# EAGLE board v1 (EAGLE 5.10)
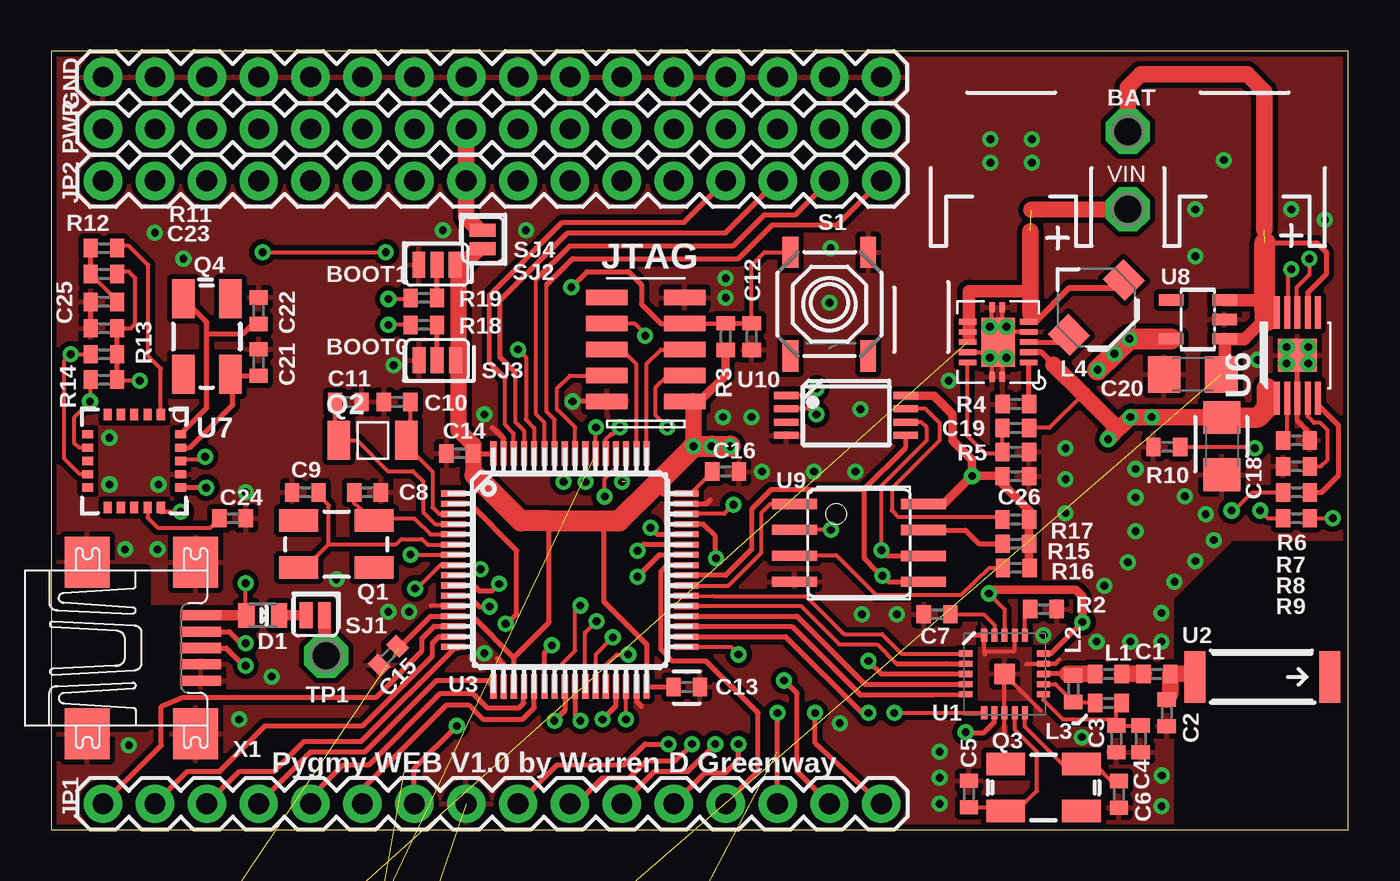
[diagram p0: board, top side]
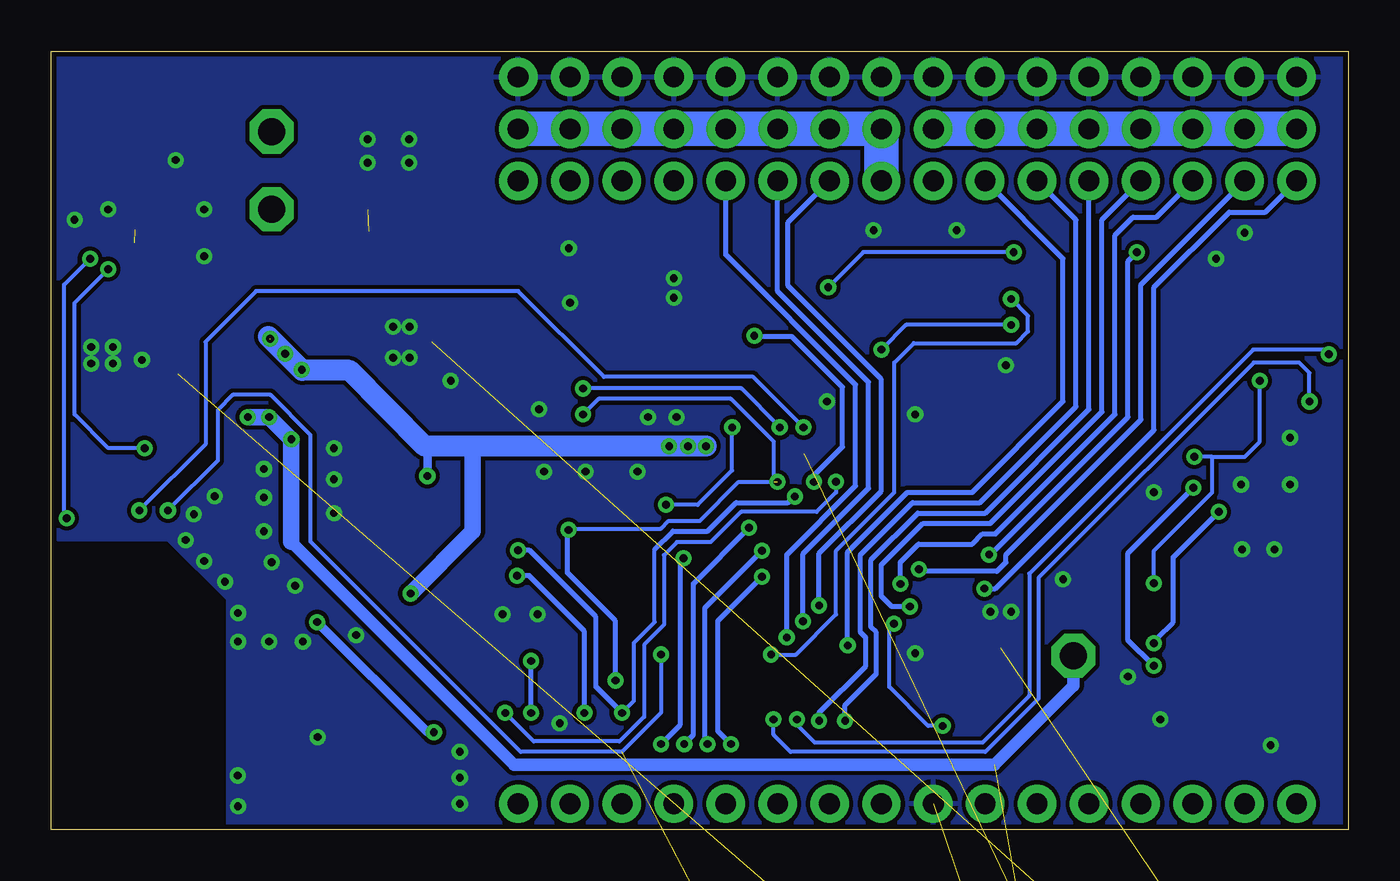
[diagram p1: board, bottom side, seen from below]

Size 63.51 x 38.1 mm. Coordinates in mm from the lower left corner, seen from the top.
Outline: 0,0 63.51,0 63.51,38.1 0,38.1 0,0
Copper layers (1*16): Top 0.035mm / dielectric 1.5mm / Bottom 0.035mm
Design rules "default *": minimum track width 8mil, minimum drill 15mil, track to track 8mil, track to pad 6mil, pad to pad 6mil, via to via 8mil, smd to smd 6mil, copper to edge 10mil, drill to drill 8mil, minimum pad ring 10mil, minimum via ring 8mil, stop-mask expansion 4mil, vias tented up to drill 0mil, thermal gap 10mil

## Footprints (pad centres in the part's own frame; a part is rotated, then mirrored left to right if it is on the bottom)
P1-13 = drill 1.321 pad 2.159 octagon: TP 0,0
C0402 = smd 0.7 x 0.9: 1 -0.65,0; 2 0.65,0
C1206 = smd 1.6 x 1.8: 1 -1.4,0; 2 1.4,0
MICROMELF-R = smd 0.8 x 1.2: A 0.8,0; C -0.8,0
1X16 = drill 1.016 pad 1.88 round: 1 0,0; 2 2.54,0; 3 5.08,0; 4 7.62,0; 5 10.16,0; 6 12.7,0; 7 15.24,0; 8 17.78,0; 9 20.32,0; 10 22.86,0; 11 25.4,0; 12 27.94,0; 13 30.48,0; 14 33.02,0; 15 35.56,0; 16 38.1,0
JST-2-SMD = smd 1 x 4.6: 1 -1,-3.7; 2 1,-3.7 | smd 1.6 x 3.4: NC1 -3.4,1.5; NC2 3.4,1.5
CDRH3D28 = smd 1.5 x 1.4 rotated 315: 1 -1.374,-1.384; 2 1.312,1.302
CRYSTAL-SMD-5X3 = smd 1.9 x 1.1: 1 -1.85,-1.15; 2 1.85,-1.15; 3 1.85,1.15; 4 -1.85,1.15
CM415 = smd 1.1 x 1.9: P$1 0,0; P$2 3.3,0
R0402 = smd 0.7 x 0.9: 1 -0.65,0; 2 0.65,0
TACTILE_SWITCH_SMD = smd 1.524 x 0.762: 1 -2.54,1.905; 2 2.54,1.905; 3 -2.54,-1.905; 4 2.54,-1.905
SJ_2S = smd 0.635 x 1.27: 1 -0.45,0; 2 0.45,0
SJ_3_PASTE1&2 = smd 0.635 x 1.27: 1 -0.889,0; 2 0,0; 3 0.889,0
QFN20 = smd 1 x 1: 0 0,0 | smd 0.65 x 0.3: 1 -1.9,1; 2 -1.9,0.5; 3 -1.9,0; 4 -1.9,-0.5; 5 -1.9,-1; 11 1.9,-1; 12 1.9,-0.5; 13 1.9,0; 14 1.9,0.5; 15 1.9,1 | smd 0.3 x 0.65: 6 -1,-1.9; 7 -0.5,-1.9; 8 0,-1.9; 9 0.5,-1.9; 10 1,-1.9; 16 1,1.9; 17 0.5,1.9; 18 0,1.9; 19 -0.5,1.9; 20 -1,1.9
ANTENNA-CHIP5 = smd 1.016 x 2.54: FEED -3.302,0; NC 3.302,0
S-PQFP64-G64 = smd 1.2 x 0.3: 1 -5.7,3.75; 2 -5.7,3.25; 3 -5.7,2.75; 4 -5.7,2.25; 5 -5.7,1.75; 6 -5.7,1.25; 7 -5.7,0.75; 8 -5.7,0.25; 9 -5.7,-0.25; 10 -5.7,-0.75; 11 -5.7,-1.25; 12 -5.7,-1.75; 13 -5.7,-2.25; 14 -5.7,-2.75; 15 -5.7,-3.25; 16 -5.7,-3.75; 33 5.7,-3.75; 34 5.7,-3.25; 35 5.7,-2.75; 36 5.7,-2.25; 37 5.7,-1.75; 38 5.7,-1.25; 39 5.7,-0.75; 40 5.7,-0.25; 41 5.7,0.25; 42 5.7,0.75; 43 5.7,1.25; 44 5.7,1.75; 45 5.7,2.25; 46 5.7,2.75; 47 5.7,3.25; 48 5.7,3.75 | smd 0.3 x 1.2: 17 -3.75,-5.7; 18 -3.25,-5.7; 19 -2.75,-5.7; 20 -2.25,-5.7; 21 -1.75,-5.7; 22 -1.25,-5.7; 23 -0.75,-5.7; 24 -0.25,-5.7; 25 0.25,-5.7; 26 0.75,-5.7; 27 1.25,-5.7; 28 1.75,-5.7; 29 2.25,-5.7; 30 2.75,-5.7; 31 3.25,-5.7; 32 3.75,-5.7; 49 3.75,5.7; 50 3.25,5.7; 51 2.75,5.7; 52 2.25,5.7; 53 1.75,5.7; 54 1.25,5.7; 55 0.75,5.7; 56 0.25,5.7; 57 -0.25,5.7; 58 -0.75,5.7; 59 -1.25,5.7; 60 -1.75,5.7; 61 -2.25,5.7; 62 -2.75,5.7; 63 -3.25,5.7; 64 -3.75,5.7
STM32-JTAG-10P = smd 0.762 x 2.032: P$1 0,0; P$2 0,3.81; P$3 1.27,0; P$4 1.27,3.81; P$5 2.54,0; P$6 2.54,3.81; P$7 3.81,0; P$8 3.81,3.81; P$9 5.08,0; P$10 5.08,3.81
S-PVSON-N10 = smd 0.28 x 0.85: P$1 0,0.4; P$2 0.5,0.4; P$3 1,0.4; P$4 1.5,0.4; P$5 2,0.4; P$6 2,3.4; P$7 1.5,3.4; P$8 1,3.4; P$9 0.5,3.4; P$10 0,3.4 | smd 2.4 x 1.65: P$11 1,1.9 | smd 0.5 x 0.26: P$12 -0.7,2.2; P$13 -0.7,1.7; P$14 2.7,1.7; P$15 2.7,2.2
R-PDSO-G10 = smd 0.3 x 1.6: P$1 0,0; P$2 0.5,0; P$3 1,0; P$4 1.5,0; P$5 2,0; P$6 2,4.2; P$7 1.5,4.2; P$8 1,4.2; P$9 0.5,4.2; P$10 0,4.2 | smd 1.9 x 1.6: P$11 1,2.1
QFN-20-5X5 = smd 0.55 x 0.4: P1 0,-0.975; P2 0,-1.625; P3 0,-2.275; P4 0,-2.925; P5 0,-3.575; P11 4.55,-3.575; P12 4.55,-2.925; P13 4.55,-2.275; P14 4.55,-1.625; P15 4.55,-0.975 | smd 0.4 x 0.55: P6 0.975,-4.55; P7 1.625,-4.55; P8 2.275,-4.55; P9 2.925,-4.55; P10 3.575,-4.55; P16 3.575,0; P17 2.925,0; P18 2.275,0; P19 1.625,0; P20 0.975,0
SOT23-5L = smd 0.55 x 1.2: 1 -0.95,-1.3; 2 0,-1.3; 3 0.95,-1.3; 4 0.95,1.3; 5 -0.95,1.3
SOIC8 = smd 0.5 x 2.2: 1 -1.905,-3.154; 2 -0.645,-3.154; 3 0.625,-3.154; 4 1.895,-3.154; 5 1.905,3.154; 6 0.635,3.154; 7 -0.635,3.154; 8 -1.905,3.154
TSSOP8 = smd 1.2 x 0.35: 1 -2.925,0.975; 2 -2.925,0.325; 3 -2.925,-0.325; 4 -2.925,-0.975; 5 2.925,-0.975; 6 2.925,-0.325; 7 2.925,0.325; 8 2.925,0.975
AYZ0202 = smd 1 x 1.15: 1 -2.5,2.825; 2 0,2.825; 3 2.5,2.825; 4 -2.5,-2.825; 5 0,-2.825; 6 2.5,-2.825 | hole 0.85: 1.5,0; -1.5,0
UX60A-MB-5ST = smd 2 x 0.5: 1 2.25,1.6; 2 2.25,0.8; 3 2.25,0; 4 2.25,-0.8; 5 2.25,-1.6 | smd 2.2 x 2.5: M1 -3.3,-4.2; M2 -3.3,4.2; M3 2,4.2; M4 2,-4.2

## Placement (x,y rotation side)
BAT  TPPAD1-13  [P1-13]  52.7,34.16 0 top
BAT1  TPPAD1-13  [P1-13]  6.3,-40.44 0 top  (outside the outline)
C1  1.5pF  [C0402]  54.13,7.62 180 top
C2  1.0pF  [C0402]  54.61,5.71 270 top
C3  0.0022uF  [C0402]  52.15,4.45 270 top
C4  4.7pF  [C0402]  53.34,4.45 270 top
C5  12.5pF  [C0402]  44.93,1.75 90 top
C6  12.5pF  [C0402]  52.27,1.73 270 top
C7  0.033uF  [C0402]  43.37,10.54 180 top
C8  12.5pF  [C0402]  15.49,16.51 0 top
C9  12.5pF  [C0402]  12.45,16.51 180 top
C10  18pF  [C0402]  16.94,20.93 180 top
C11  18pF  [C0402]  14.55,20.93 0 top
C12  220pF  [C0402]  34.29,24.13 270 top
C13  0.1uF  [C0402]  31.11,6.99 0 top
C14  0.1uF  [C0402]  20,18.41 180 top
C15  0.1uF  [C0402]  16.51,8.51 225 top
C16  0.1uF  [C0402]  33.02,17.53 0 top
C17  10uF  [C1206]  2.24,-148.95 0 top  (outside the outline)
C18  10uF  [C1206]  57.3,18.77 270 top
C19  0.1uF  [C0402]  47.23,20.83 180 top
C20  10uF  [C1206]  55.88,22.28 180 top
C21  18pF  [C0402]  10.16,22.86 90 top
C22  18pF  [C0402]  10.16,25.4 90 top
C23  0.1uF  [C0402]  2.59,25.83 180 top
C24  0.47uF  [C0402]  8.89,15.24 0 top
C25  0.1uF  [C0402]  2.59,24.54 180 top
C26  0.1uF  [C0402]  47.22,17.3 0 top
C27  10uF  [C1206]  -4.06,-18.69 0 top  (outside the outline)
C28  0.1uF  [C0402]  0,-39.83 90 top  (outside the outline)
C29  10uF  [C1206]  -1.22,-33.73 0 top  (outside the outline)
C30  10uF  [C1206]  3.66,-33.73 0 top  (outside the outline)
D1  [MICROMELF-R]  10.36,10.49 180 top
GND  M16PTH  [1X16]  40.64,36.83 180 top
JP1  M16PTH  [1X16]  2.54,1.27 0 top
JP2  M16PTH  [1X16]  2.54,31.75 0 top
JP3  [JST-2-SMD]  -4.88,-51.21 0 top  (outside the outline)
L1  3.9nH  [C0402]  51.75,7.62 180 top
L2  8.2nH  [C0402]  50.04,6.9 270 top
L3  2.7nH  [C0402]  51.76,6.2 180 top
L4  [CDRH3D28]  51.14,25.51 180 top
L5  [CDRH3D28]  11.18,-33.73 0 top  (outside the outline)
PWR  M16PTH  [1X16]  2.54,34.29 0 top
Q1  12MHz  [CRYSTAL-SMD-5X3]  13.97,13.97 180 top
Q2  CM415  [CM415]  14.1,19.05 0 top
Q3  16MHz  [CRYSTAL-SMD-5X3]  48.58,2.06 0 top
Q4  12MHz  [CRYSTAL-SMD-5X3]  7.62,24.13 90 top
R1  2M  [R0402]  9.75,-50.6 0 top  (outside the outline)
R2  22K  [R0402]  48.58,10.79 180 top
R3  100K  [R0402]  33.02,24.13 270 top
R4  2M  [R0402]  47.22,19.66 0 top
R5  220K  [R0402]  47.22,18.49 180 top
R6  1K  [R0402]  60.96,19.05 180 top
R7  1K  [R0402]  60.96,17.78 0 top
R8  330  [R0402]  60.96,16.51 0 top
R9  330  [R0402]  60.96,15.24 0 top
R10  10K  [R0402]  54.61,18.73 0 top
R11  10K  [R0402]  2.59,27.19 0 top
R12  470  [R0402]  2.59,28.46 180 top
R13  47K  [R0402]  2.59,23.27 0 top
R14  47K  [R0402]  2.59,22.02 0 top
R15  100K  [R0402]  47.23,14 0 top
R16  100K  [R0402]  47.24,12.81 180 top
R17  100K  [R0402]  47.22,15.18 180 top
R18  47K  [R0402]  18.25,24.7 180 top
R19  47K  [R0402]  18.25,26.02 180 top
R20  220K  [R0402]  12.19,-39.62 0 top  (outside the outline)
R21  1K  [R0402]  0.2,-45.52 0 top  (outside the outline)
R22  1K  [R0402]  5.28,-45.52 0 top  (outside the outline)
R23  330  [R0402]  10.36,-45.52 0 top  (outside the outline)
R24  330  [R0402]  -5.49,-50.6 0 top  (outside the outline)
R25  10K  [R0402]  -0.41,-50.6 0 top  (outside the outline)
S1  SWITCH-MOMENTARY-2SMD  [TACTILE_SWITCH_SMD]  38.1,25.72 270 top
SJ1  SOLDERJUMPERNC  [SJ_2S]  12.93,10.49 0 top
SJ2  [SJ_3_PASTE1&2]  18.89,27.65 0 top
SJ3  [SJ_3_PASTE1&2]  18.9,22.97 0 top
SJ4  SOLDERJUMPERNC  [SJ_2S]  21.13,28.88 270 top
TP1  TPPAD1-13  [P1-13]  13.46,8.51 0 top
TP2  TPPAD1-13  [P1-13]  4.67,-51.41 0 top  (outside the outline)
U1  NRF24L01SMD  [QFN20]  46.67,7.62 0 top
U2  ANTENNA2SMD5  [ANTENNA-CHIP5]  59.29,7.47 0 top
U3  STM32F100R4T6B  [S-PQFP64-G64]  25.4,12.7 0 top
U4  STM32-JTAG-10P  [STM32-JTAG-10P]  31.01,20.95 90 top
U5  TPS61201  [S-PVSON-N10]  48.26,22.86 90 top
U6  BQ24090  [R-PDSO-G10]  60.01,21.11 0 top
U7  MICROCHIP-USB-MCP2200  [QFN-20-5X5]  6.35,20.32 270 top
U8  NCP500  [SOT23-5L]  56.13,24.97 90 top
U9  SST25VF080B  [SOIC8]  39.55,14.03 270 top
U10  N25S0830HA  [TSSOP8]  38.91,20.27 0 top
U11  BQ24090  [R-PDSO-G10]  13,-21.13 90 top  (outside the outline)
U12  TPS61201  [S-PVSON-N10]  -5.89,-40.64 270 top  (outside the outline)
U13  NCP500  [SOT23-5L]  -4.88,-26.21 0 top  (outside the outline)
U$1  AYZ0202  [AYZ0202]  1.22,-53.44 0 top  (outside the outline)
VIN  TPPAD1-13  [P1-13]  52.7,30.35 0 top
VIN1  TPPAD1-13  [P1-13]  -5.69,-46.33 0 top  (outside the outline)
X1  MINI-USB-UX60A-MB-5ST  [UX60A-MB-5ST]  5.08,8.89 0 top

## Library data of the parts
BAT BAT1 TP1 TP2 VIN VIN1 = testpad
C1-C30 R1-R25 = rcl
D1 = diode
GND JP1-JP3 L1-L5 PWR Q1 Q3 Q4 S1 SJ1-SJ4 U1 U2 U$1 = SparkFun
Q2 U3-U13 X1 = dublib

## Nets
+3V3: C13.1 C14.1 C15.1 C16.1 C26.1 R3.2 R15.2 R16.1 R17.1 SJ2.3 SJ3.3 SJ4.2 U1.7 U1.15 U1.18 U3.1 U3.13 U3.19 U3.32 U3.48 U3.64 U4.P$1 U8.5 U9.8 U10.8 U13.5
+5V: C17.1 C18.1 R1.2 R4.2 SJ1.2 TP1.TP TP2.TP U5.P$2 U6.P$1 U11.P$1 U12.P$2
ADC1_IN10: JP2.1 U3.8
ADC1_IN11: JP2.2 U3.9
ADC1_IN12: JP2.3 U3.10
ADC1_IN13: JP2.4 U3.11
ADC1_IN14: JP2.5 U3.24
ADC1_IN15: JP2.6 U3.25
BAT_CHG: R9.1 R24.1 U3.54
BAT_PG: R8.1 R23.1 U3.33
BOOT0: R18.2 U3.60
BOOT1: R19.2 U3.28
DAC1_OUT: JP1.5 U3.20
DAC2_OUT: JP1.6 U3.21
FLASH_CS: U3.39 U9.1
GND: C2.2 C3.2 C4.2 C5.2 C6.2 C7.2 C8.2 C9.2 C10.2 C11.2 C12.2 C13.2 C14.2 C15.2 C16.2 C17.2 C18.2 C19.2 C20.2 C21.2 C22.2 C23.2 C24.2 C25.2 C26.2 C27.1 C28.2 C29.2 C30.1 GND.1 GND.2 GND.3 GND.4 GND.5 GND.6 GND.7 GND.8 GND.9 GND.10 GND.11 GND.12 GND.13 GND.14 GND.15 GND.16 JP1.8 JP3.2 R2.1 R5.1 R6.1 R7.1 R10.1 R20.1 R21.1 R22.1 R25.1 S1.1 SJ2.1 SJ3.1 U1.0 U1.8 U1.14 U1.17 U1.20 U3.12 U3.18 U3.31 U3.47 U3.63 U4.P$2 U4.P$9 U5.P$4 U5.P$9 U5.P$11 U5.P$12 U5.P$13 U5.P$14 U5.P$15 U6.P$3 U6.P$11 U7.P17 U8.2 U9.4 U10.4 U11.P$3 U11.P$11 U12.P$4 U12.P$9 U12.P$11 U12.P$12 U12.P$13 U12.P$14 U12.P$15 U13.2 X1.4 X1.5 X1.M1 X1.M2 X1.M3 X1.M4
JTCK: U3.49 U4.P$5
JTDI: U3.50 U4.P$6
JTDO: U3.55 U4.P$8
JTMS: U3.46 U4.P$3
JTRST: U3.56 U4.P$4
N$1: C1.1 C2.1 U2.FEED
N$2: C1.2 L1.1
N$3: L1.2 L2.1 U1.13
N$4: L2.2 L3.2 U1.12
N$5: C3.1 C4.1 L3.1 U1.11
N$6: C27.2 L4.1 U5.P$5 U5.P$6 U5.P$7 U5.P$8 VIN.TP
N$7: C6.1 Q3.3 U1.10
N$8: C5.1 Q3.1 U1.9
N$9: R4.1 R5.2 U5.P$10
N$10: R2.2 U1.16
N$11: C7.1 U1.19
N$12: R6.2 U6.P$2
N$13: R7.2 U6.P$4
N$14: R8.2 U6.P$5
N$15: C19.1 U5.P$1
N$16: L4.2 U5.P$3
N$17: R9.2 U6.P$8
N$18: R10.2 U6.P$9
N$19: C23.1 R11.1 R12.2
N$20: C25.1 D1.A R11.2 R13.2 R14.2 U7.P18 X1.1
N$21: C22.1 Q4.3 U7.P20
N$22: C21.1 Q4.1 U7.P19
N$23: C30.2 L5.1 U12.P$5 U12.P$6 U12.P$7 U12.P$8 U$1.3 VIN1.TP
N$24: R12.1 U7.P1
N$25: U7.P16 X1.3
N$26: U7.P15 X1.2
N$27: R17.2 U10.7
N$28: C24.1 U7.P14
N$29: D1.C SJ1.1
N$30: R16.2 U9.3
N$31: R18.1 SJ3.2
N$32: R15.1 U9.7
N$33: R19.1 SJ2.2
N$34: JP2.8 PWR.1 PWR.2 PWR.3 PWR.4 PWR.5 PWR.6 PWR.7 PWR.8 SJ4.1
N$35: R1.1 R20.2 U12.P$10
N$36: C28.1 U12.P$1
N$37: L5.2 U12.P$3
N$38: R21.2 U11.P$2
N$39: R22.2 U11.P$4
N$40: R23.2 U11.P$5
N$41: R25.2 U11.P$9
N$42: R24.2 U11.P$8
N$43: JP3.1 U$1.2
NRST: C12.1 R3.1 S1.3 U3.7 U4.P$7
OSC32_IN: C10.1 Q2.P$2 U3.3
OSC32_OUT: C11.1 Q2.P$1 U3.4
OSC_IN: C8.1 Q1.1 U3.5
OSC_OUT: C9.1 Q1.3 U3.6
PA0: JP1.1 U3.14
PA1: JP1.2 U3.15
PA2: JP1.3 U3.16
PA3: JP1.4 U3.17
RF24_CS: U1.2 U3.37
RF24_EN: U1.1 U3.38
RF24_IRQ: U1.6 U3.57
RF24_MISO: U1.5 U3.35
RF24_MOSI: U1.4 U3.36
RF24_SCK: U1.3 U3.34
SPI_CS1: JP1.7 U3.2
SPI_MISO: JP1.15 U3.51 U9.2 U10.2
SPI_MOSI: JP1.16 U3.40 U9.5 U10.5
SPI_SCK: JP1.14 U3.52 U9.6 U10.6
SRAM_CS: U3.53 U10.1
TIM1_CH1: JP1.13 U3.41
TIM3_CH1: JP2.7 U3.22
TIM3_CH2: JP2.10 U3.23
TIM3_CH3: JP2.11 U3.26
TIM3_CH4: JP2.12 U3.27
TIM4_CH1: JP2.16 U3.58
TIM4_CH2: JP2.15 U3.59
TIM4_CH3: JP2.14 U3.61
TIM4_CH4: JP2.13 U3.62
USART1_CTS: JP1.11 U3.44
USART1_RTS: JP1.12 U3.45
USART1_RX: JP1.10 U3.43
USART1_TX: JP1.9 U3.42
USART3_RX: R14.1 U3.30 U7.P7
USART3_TX: R13.1 U3.29 U7.P9
V+: BAT1.TP BAT.TP C20.1 C29.1 U6.P$7 U6.P$10 U8.1 U8.3 U11.P$7 U11.P$10 U13.1 U13.3 U$1.1
VCCINT: JP2.9 PWR.9 PWR.10 PWR.11 PWR.12 PWR.13 PWR.14 PWR.15 PWR.16

## Tracks (layer width: path | path; a pad name or v marks a point on that pad's centre or on a via)
+3V3  (via drill 0.38)  (2 unrouted)
  Top 0.203: U1.18 46.67,10.79 v45.91,11.56 | U3.48 31.29,16.45 C16.1
  Top 0.254: 22.65,8.43 24.38,10.16 24.38,15.11 | 22.65,8.43 20.63,10.45 U3.13 18.58,10.45 17.02,8.89 C15.1 | C13.1 29.16,6.99 U3.32 29.15,9.08 27.05,11.18 27.05,14.86 27.3,15.11 | U3.48 29.91,16.45 29.53,16.83 | C14.1 20.67,18.4 U3.64 | 22.65,8.43 U3.19 | U1.15 48.94,8.62 v50.48,10.16 | U1.7 46.17,5.25 45.67,4.75 44.93,4.75 v44.77,4.76 | U3.1 20.64,16.45 21.14,16.95
  Top 0.406: U9.8 43.71,15.94 v45.09,17.31 | v45.09,17.31 46.49,17.31 C26.1 46.57,16.93 47.94,15.56 47.94,14.93 R17.1 47.87,13.58 | 47.87,13.58 R15.2 | U10.8 43.21,21.24 44.13,20.32 44.13,19.05 45.09,18.1 v45.09,17.31 | 47.87,13.58 47.87,12.84 R16.1 | 31.43,20.95 U4.P$1 31.75,20.95 33.02,22.23 R3.2 | v50.48,10.16 50.48,11.43 50.16,11.75 45.97,11.75 v45.91,11.56 | 20.83,28.32 21.28,28.32 SJ4.2 | SJ2.3 19.84,27.65 20,27.5 | 20.68,18.41 C14.1 | SJ3.3 19.79,20.09 19.94,19.94
  Top 0.813: v31.45,18.77 31.45,20.94 31.43,20.95 | 20.75,17.35 20.68,17.42 20.68,18.41 20.68,18.82 19.94,19.56 19.94,19.94 19.94,27.43 20,27.5 20.83,28.32
  Top 1.016: U8.5 52.8,24.02 v51.23,22.5 | 31.47,18.77 v31.45,18.77 | 31.47,18.77 v32.33,18.77 v33.25,18.77 | 31.47,18.77 29.53,16.83 27.81,15.11 27.3,15.11 24.38,15.11 22.99,15.11 21.14,16.95 20.75,17.35
  Bottom 0.406: v45.09,17.31 45.09,18.45 44.77,18.77 | v44.77,4.76 45.09,4.76 v50.48,10.16 | v52.05,23.29 v52.78,24.03
  Bottom 0.813: v45.91,11.56 42.86,14.61 42.86,18.45 43.18,18.77
  Bottom 1.016: v31.45,18.77 v32.33,18.77 v33.25,18.77 43.18,18.77 44.77,18.77 45.21,18.77 48.9,22.48 51.21,22.48 v51.23,22.5 52.86,24.13
+5V  (via drill 0.38)  (5 unrouted)
  Top 0.203: R4.2 48.87,19.66 50.52,21.31
  Top 0.254: 59.53,21.59 | 59.53,21.59 U6.P$1
  Top 0.305: U5.P$2 48.47,23.36 49.07,22.76
  Top 0.61: SJ1.2 13.38,8.59 TP1.TP
  Top 0.813: 49.07,22.76 50.52,21.31 52.22,19.61 v51.74,19.1 v52.83,20.19 v53.87,20.19 57.15,20.19 C18.1
  Top 1.016: C18.1 59.08,20.19 59.53,20.64 59.53,21.59
  Bottom 0.61: 51.75,14.1 40.83,3.17 17.34,3.17 13.46,7.05 TP1.TP | v53.87,20.19 53.98,20.19
  Bottom 0.813: 51.75,14.1 51.75,19.1 v52.83,20.19 v53.87,20.19
ADC1_IN10  (via drill 0.38)
  Top 0.203: U3.8 19.05,12.95 18.03,11.94 17.58,11.94 v17.82,11.8
  Bottom 0.254: JP2.1 4.06,30.23 5.84,30.23 9.53,26.54 9.53,19.56 17.29,11.8 v17.82,11.8
ADC1_IN11  (via drill 0.38)
  Top 0.203: U3.9
  Top 0.254: U3.9 20.52,12.45 20.83,12.75 v21.03,12.75
  Bottom 0.254: v21.03,12.75 20.78,12.64 17.21,12.64 16.76,13.08 16.76,13.46 10.16,20.07 10.16,26.67 JP2.2
ADC1_IN12  (via drill 0.38)
  Top 0.203: U3.10 19.71,11.96
  Top 0.254: 19.71,11.96 20.68,11.96 20.95,11.68 21.59,11.68 v21.93,12.03
  Bottom 0.254: v21.93,12.03 21.93,13.08 21.04,13.97 18.41,13.97 17.91,14.48 17.27,14.48 11.43,20.32 11.43,29.08 10.54,29.97 9.4,29.97 JP2.3
ADC1_IN13  (via drill 0.38)
  Top 0.254: U3.11 20.43,11.45 20.95,10.92 v21.46,10.92
  Bottom 0.254: v21.46,10.92 22.35,10.92 22.86,11.43 22.86,12.95 20.83,14.99 17.53,14.99 12.06,20.45 12.06,29.84 JP2.4
ADC1_IN14  (via drill 0.38)
  Top 0.254: U3.24 25.15,5.85 v24.64,5.33
  Bottom 0.254: v24.64,5.33 24.64,6.1 23.11,7.62 23.11,9.65 23.37,9.91 23.37,13.21 21.08,15.49 17.78,15.49 12.7,20.57 JP2.5
ADC1_IN15  (via drill 0.38)
  Top 0.254: U3.25 25.65,5.59 v25.91,5.33
  Bottom 0.254: v25.91,5.33 25.91,5.71 23.62,8 23.62,9.4 23.88,9.65 23.88,13.46 21.34,16 18.03,16 13.34,20.7 13.34,29.84 JP2.6
BAT_CHG  (via drill 0.38)  (1 unrouted)
  Top 0.203: U3.54 26.65,19.66 v26.67,19.68 | R9.1 59.56,15.24 v59.18,15.62
  Bottom 0.203: v26.67,19.68 29.15,22.16 36.45,22.16 40.64,26.35 53.47,26.35 55.94,23.88 55.94,18.86 v59.18,15.62
BAT_PG  (via drill 0.38)  (1 unrouted)
  Top 0.203: U3.33 33.28,8.95 v33.66,8.57 | v57.78,15.62 57.91,15.62 58.8,16.51 R8.1
  Bottom 0.203: v33.66,8.57 33.66,5.71 35.56,3.81 40.51,3.81 50.8,14.1 50.8,19.3 52.77,21.27 54.61,21.27 55.35,20.54 55.35,18.06 v57.78,15.62
BOOT0  (via drill 0.38)
  Top 0.203: U3.60 23.65,19.66 23.24,20.07 23.24,23.11 v22.86,23.5 | R18.2 v16.51,24.7
  Bottom 0.203: v22.86,23.5 21.65,24.7 v16.51,24.7
BOOT1  (via drill 0.38)
  Top 0.203: v16.51,25.97 17.42,25.97 R19.2 | U3.28 27.15,8.04 27.69,8.57 v28.26,8.57
  Bottom 0.203: v28.26,8.57 27.05,8.57 25.08,10.54 25.08,13.65 22.23,16.51 22.23,22.86 21.27,23.81 16.26,23.81 15.68,24.38 15.68,25.15 v16.51,25.97
DAC1_OUT
  Top 0.254: JP1.5 12.7,1.59 14.29,3.17 15.56,3.17 19.05,6.67 20.64,6.67 21.34,5.97 22.91,5.97 23.14,6.2 23.14,6.99 U3.20
DAC2_OUT
  Top 0.254: JP1.6 15.24,1.99 19.36,6.11 20.43,6.11 21.13,5.41 23.09,5.41 23.65,5.97 U3.21
FLASH_CS
  Top 0.203: U3.39 33.16,11.95 34.77,13.56 34.77,15.51 35.2,15.94 U9.1
GND  (via drill 0.38)  (20 unrouted)
  Top 0.203: U5.P$9 45.86,23.36 U5.P$11 | U5.P$15 46.06,24.16 U5.P$11 | U5.P$14 46.56,24.06 U5.P$11 | U5.P$4 46.59,24.36 46.35,24.13 | U5.P$13 46.56,23.66 U5.P$11 | U5.P$12 46.06,23.56 U5.P$11 | 48.44,5.84 46.67,7.61 U1.0 U1.8 46.67,4.76 | U1.20 45.67,8.62 45.72,8.57 | U1.14 49.14,8.12 49.15,8.13 | U1.17 47.17,8.77 47.14,8.74 45.72,8.74 45.67,8.79 45.67,9.5 45.64,9.53 45.09,9.53 | 49.15,8.13 49.35,8.33 | 49.15,8.13 47.78,8.13 47.73,8.08 | U3.12 18.62,10.95 18.59,10.97
  Top 0.254: C25.2 C23.2 | U6.P$11 U6.P$3 61.01,20.02 61.44,19.58 61.44,19.22 R6.1 | U3.31 28.65,6.28 28.89,6.03 | U4.P$2 25.72,20.95 | U3.63 22.15,19.12 21.59,19.68 | U3.47 32.08,15.95 32.26,16.13 | U3.18 22.15,8.08 21.84,8.38
  other vias: 54.37,2.65 39.69,10.54 62.36,29.84 54.36,1.14 38.16,28.45 51.18,9.21 52.83,9.21 54.36,9.21 54.36,10.6 56.01,13.14 54.99,12.13 56.52,15.43 9.21,5.4 3.81,4.13 60.48,23.62 61.54,23.62 60.48,22.81 61.54,22.81 45.95,24.61 46.76,24.61 45.95,23.09 46.76,23.09 50.46,4.53 43.5,1.27 43.5,3.81 48.58,9.53 43.5,2.54 55.5,16.32 25.53,20.95 33.02,26.04 33.02,26.99 3.62,13.72 2.86,19.18 2.86,16.89 5.26,16.89 13.97,12.26 9.53,16.51 21.21,8.64 21.21,20.32 38.1,25.78 39.62,20.57 32.89,20.19 34.29,20.19 17.53,10.67 10.79,7.49 5.21,13.72 38.61,5.21 41.4,10.54 49.66,18.67 49.66,17.14 49.66,15.49 56.92,14.17 59.05,22.99 45.97,33.78 45.97,32.64 48.01,32.64 48.01,33.78 56.01,30.35 56.01,28.07 57.4,32.77 60.71,30.35 43.94,21.97 51.56,11.94 52.7,13.08 53.09,14.61 53.09,16.26 53.09,17.65 5.08,29.21 6.48,27.94 34.8,17.53 37.34,17.53 39.37,17.53 16.76,22.73 23.24,29.34 19.18,29.34 16.51,10.67
  pour Top (isolate 0.254): 0.32,37.78 63.18,37.78 63.18,14.22 57.78,14.22 54.86,11.3 54.86,0.32 0.32,0.32
  pour Bottom: 0.32,37.78 63.18,37.78 63.18,14.22 57.78,14.22 54.86,11.3 54.86,0.32 0.32,0.32
JTCK
  Top 0.203: U3.49 29.15,22.8 29.84,23.5 U4.P$5
JTDI
  Top 0.203: 27.94,23.5 28.65,22.78 U3.50
  Top 0.254: 27.94,23.5 U4.P$6 | U3.50
JTDO  (via drill 0.38)
  Top 0.203: U3.55 26.15,16.83 v26.16,17.02 | v29.08,24.17 29.21,24.13 28.57,24.77 U4.P$8
  Bottom 0.254: v26.16,17.02 26.16,17.34 24.77,18.73 24.77,21.65 27.24,24.13 29.05,24.13 v29.08,24.17
JTMS  (via drill 0.38)
  Top 0.203: U3.46 32.95,15.45 v33.4,15.9 | U4.P$3 30.16,22.23 29.59,21.65 29.59,20.27 30.16,19.7 v30.16,19.68
  Bottom 0.203: v33.4,15.9 31.85,15.9 30.16,17.59 v30.16,19.68
JTRST
  Top 0.203: U3.56 25.65,19.69 24.77,20.57 24.77,21.59 25.4,22.23 U4.P$4
N$1
  Top 0.813: U2.FEED 56.01,6.92 56.01,7.62 C1.1 54.79,6.65 C2.1
N$2
  Top 0.813: L1.1 C1.2
N$3
  Top 0.254: 49.53,7.62 U1.13
  Top 0.305: 50.11,7.62 L2.1 49.74,7.62 49.53,7.62
  Top 0.813: 49.74,7.62 50.11,7.62 L1.2
N$4
  Top 0.203: U1.12 49.16,7.12 L2.2 51.06,6.25 L3.2
N$5
  Top 0.203: C3.1 C4.1 | U1.11 48.57,6.36 49.53,5.4 52.13,5.4 C3.1 | C3.1 52.15,5.93 L3.1
N$6  (2 unrouted)
  Top 0.203: U5.P$8 U5.P$7 44.93,24.29 44.93,24.13
  Top 0.254: U5.P$5 47.86,25.16 47.94,25.24
  Top 0.305: U5.P$5 48.2,24.86 49.85,26.51 52.75,26.51 L4.1 | U5.P$6 44.86,25.33 44.93,24.13
  Top 0.61: 44.93,24.13 44.93,26.35 47.62,26.35 47.94,26.67
  Top 0.813: 47.94,25.24 47.94,26.67 47.94,29.27 | 47.99,30.34 VIN.TP
N$7
  Top 0.203: U1.10 47.67,5.03 49.53,3.17 50.39,3.17 Q3.3 50.47,3.17 51.12,3.17 51.91,2.38 C6.1
N$8
  Top 0.203: U1.9 47.17,4.9 48.26,3.81 48.26,1.91 47.31,0.95 46.77,0.95 Q3.1 46.55,1.1 C5.1
N$9
  Top 0.203: U5.P$10 44.86,19.27 45.72,18.41 46.49,18.41 R5.2 R4.1
N$10
  Top 0.203: U1.16 47.67,10.41 R2.2
N$11
  Top 0.203: U1.19 46.17,10.03 45.66,10.54 C7.1
N$12
  Top 0.203: U6.P$2 60.51,19.25 R6.2
N$13
  Top 0.203: U6.P$4 61.51,20.23 61.82,19.91 62.13,19.91 62.48,19.56 62.48,18.11 62.15,17.78 R7.2
N$14
  Top 0.254: U6.P$5 62.01,20.79 63.03,19.77 63.03,17.34 62.2,16.51 R8.2
N$15
  Top 0.254: U5.P$1 47.86,21.02 C19.1
N$16
  Top 0.254: U5.P$3 50.18,23.86 L4.2
N$17  (via drill 0.38)
  Top 0.203: v61.59,27.94 61.59,27.15 60.96,26.51 60.96,25.36 U6.P$8 | R9.2 v62.74,15.24
  Top 0.254: R9.2 61.61,15.26
  Bottom 0.203: v62.74,15.24 62.87,15.37 62.87,26.67 v61.59,27.94
N$18  (via drill 0.38)
  Top 0.203: R10.2 58.86,18.73 v58.93,18.67 | v60.71,27.43 60.53,27.25 60.53,25.33 U6.P$9
  Bottom 0.203: v58.93,18.67 60.71,18.67 62.36,20.32 62.36,25.78 v60.71,27.43
N$19
  Top 0.203: C23.1 3.24,25.89 R11.1
  Top 0.254: R11.1 R12.2
N$20  (via drill 0.38)
  Top 0.203: C25.1 3.9,24.54 4.13,24.77 4.13,26.99 3.81,27.3 3.35,27.3 R11.2 | R14.2 3.24,21.97 v4.34,21.97 | v7.54,18.25 7.46,18.25 7.3,18.1 6.4,18.1 U7.P18 | X1.1 9.51,10.49 9.53,10.48 v9.53,12.06
  Top 0.254: R13.2 R14.2 C25.1
  Top 0.508: X1.1 9.44,10.49 D1.A
  Bottom 0.203: v4.34,21.97 4.34,18.99 5.08,18.25 6.67,18.25 | 6.67,18.25 v7.54,18.25 | v9.53,12.06 9.53,13.65 6.67,16.51 6.67,18.25
N$21
  Top 0.254: U7.P20 6.33,19.34 7.62,20.64 7.62,24.21 | 7.62,24.21 7.62,24.83 Q4.3 | C22.1 9.89,24.75 9.4,24.26 7.67,24.26 7.62,24.21
N$22
  Top 0.254: U7.P19 6.78,18.7 8.89,20.79 8.89,22.16 Q4.1 8.84,22.21 C21.1
N$23  (7 unrouted)
N$24
  Top 0.203: U7.P1 5.38,22.57 4.76,23.18 4.76,27.62 3.81,28.57 3.35,28.57 R12.1
N$25  (via drill 0.38)
  Top 0.254: X1.3 8.57,8.89 9.44,8.03 v9.53,8.03 | v7.59,16.74 U7.P16
  Bottom 0.254: v9.53,8.03 10.79,9.27 10.79,13.54 v7.59,16.74
N$26  (via drill 0.38)
  Top 0.254: X1.2 8.72,9.69 9.21,9.21 v9.53,9.12 | v6.35,15.56 5.38,15.54 U7.P15
  Bottom 0.254: v9.53,9.12 9.37,9.36 8.57,10.16 8.57,13.34 v6.35,15.56
N$27
  Top 0.203: 46.48,15.32 41.45,15.32 41.15,15.62 41.15,16.7 43.5,19.05 43.5,19.9 42.8,20.6 U10.7
  Top 0.254: R17.2 46.61,15.16 46.48,15.32
N$28
  Top 0.203: U7.P14 4.72,15.28 5.22,14.78 7.81,14.78 C24.1
N$29
  Top 0.508: D1.C SJ1.1
N$30
  Top 0.203: R16.2 45.92,12.81 44.56,11.51 40.37,11.51 38.44,13.44 36.8,13.44 U9.3
N$31
  Top 0.254: SJ3.2 18.9,22.56 R18.1
N$32
  Top 0.254: R15.1 45.41,13.99 44.76,14.66 42.72,14.66 U9.7
N$33
  Top 0.254: SJ2.2 18.89,26.5 R19.1
N$34
  Top 0.61: SJ4.1 20.84,29.33 20.83,29.46
  Top 0.813: 20.83,29.46 20.32,29.97 JP2.8 PWR.8
  Bottom 1.676: PWR.8 PWR.7 PWR.6 PWR.5 PWR.4 PWR.3 PWR.2 PWR.1
N$35  (2 unrouted)
N$36  (1 unrouted)
N$37  (1 unrouted)
N$38  (1 unrouted)
N$39  (1 unrouted)
N$40  (1 unrouted)
N$41  (1 unrouted)
N$42  (1 unrouted)
N$43  (1 unrouted)
NRST  (via drill 0.38)
  Top 0.203: S1.3 34.92,28.26 34.29,27.62 C12.1 | U3.7 18.21,13.45 v17.59,13.46 | v10.35,28.26 v16.38,28.26
  Top 0.254: C12.1 R3.1 U4.P$7 29.84,24.77 28.89,25.72 28.89,26.67 28.26,27.3 26.23,27.3 v25.46,26.54
  Bottom 0.203: v16.38,28.26 23.75,28.26 v25.46,26.54
  Bottom 0.254: v17.59,13.46 17.53,13.46 10.79,20.19 10.79,27.81 v10.35,28.26
OSC32_IN
  Top 0.203: U3.3 18.99,15.45 18.67,15.77 18.67,17.53 17.78,18.41 17.78,18.93 Q2.P$2 17.59,19.12 C10.1
OSC32_OUT
  Top 0.203: U3.4 18.81,14.95 18.21,15.54 18.21,17.04 17.7,17.55 16.48,17.55 14.99,19.05 Q2.P$1 13.9,19.37 C11.1
OSC_IN
  Top 0.203: U3.5 18.57,14.45 17.78,15.24 16.57,15.24 Q1.1 14.84,15.97 C8.1
OSC_OUT
  Top 0.203: U3.6 18.43,13.95 18.16,14.22 17.14,14.22 16.89,13.97 13.59,13.97 | C9.1 13.1,16.37 13.59,15.88 13.59,13.97 | 13.59,13.97 12.7,13.08 12.38,13.08 Q1.3
PA0
  Top 0.203: U3.14
  Top 0.254: JP1.1 5.4,4.13 5.4,6.03 6.45,6.48 15.9,6.48 18.16,8.76 18.16,9.37 18.75,9.96 U3.14
PA1
  Top 0.203: 19.55,9.45 U3.15
  Top 0.254: JP1.2 6.67,2.86 8.26,2.86 10.48,5.08 15.24,5.08 18.67,8.51 18.67,9.14 18.97,9.45 19.55,9.45
PA2
  Top 0.254: JP1.3 9.21,2.86 10.92,2.86 12.38,4.32 15.18,4.32 19.75,8.89 19.96,8.89 U3.16
PA3
  Top 0.254: JP1.4 12.7,3.81 15.37,3.81 18.86,7.3 21.35,7.3 U3.17
RF24_CS
  Top 0.203: 41.39,8.13 40.45,9.07 38.59,9.07 36.71,10.95 32.37,10.95 U3.37
  Top 0.254: 41.39,8.13 43.81,8.13 U1.2
RF24_EN
  Top 0.203: U1.1 41.63,8.62 40.68,9.58 38.81,9.57 36.96,11.43 32.39,11.43 U3.38
RF24_IRQ  (via drill 0.38)
  Top 0.203: U3.57 25.15,16.89 v25.08,17.03 | v41.27,5.71 44.08,5.71 U1.6
  Bottom 0.203: v25.08,17.03 25.08,16.51 26.04,15.56 29.73,15.56 31.22,14.07 32.87,14.07 33.5,13.44 33.5,10.02 34.48,9.04 34.48,5.52 35.69,4.32 39.88,4.32 v41.27,5.71
RF24_MISO
  Top 0.254: U3.35 36.27,9.95 39.61,6.6 43.17,6.6 U1.5
RF24_MOSI
  Top 0.254: U3.36 36.5,10.45 39.84,7.11 43.18,7.11 U1.4
RF24_SCK  (via drill 0.38)
  Top 0.254: U3.34 35.95,9.45 39.69,5.71 v40.01,5.71 | v40.01,8.26 40.64,7.62 U1.3
  Bottom 0.254: v40.01,5.71 v40.01,8.26
SPI_CS1  (via drill 0.38)
  Top 0.254: U3.2 20.5,15.95 22.8,13.65 22.8,10.54 22.34,10.08 v22.25,10.08 | JP1.7 17.78,3 v19.86,5.08
  Bottom 0.203: v19.86,5.08 20.57,5.08 22.48,6.99 22.48,9.98 v22.25,10.08
SPI_MISO  (via drill 0.38)  (1 unrouted)
  Top 0.203: U10.2 37.1,20.59 v37.47,20.32 | U3.51 28.14,17.21 v27.95,17.02 | U9.2 38.24,14.68 v38.18,14.67
  Top 0.254: JP1.15 36.51,2.86 36.51,6.67 v35.88,7.3
  Bottom 0.203: v38.18,14.67 38.11,14.73 33.66,14.73 33.27,15.11 31.75,15.11 29.84,17.02 28.13,17.02 28.13,18.99 30.23,21.08 36.7,21.08 v37.47,20.32
  Bottom 0.254: v35.88,7.3 35.88,10.22 38.23,12.57 38.23,14.62 v38.18,14.67
SPI_MOSI  (via drill 0.38)
  Top 0.203: U10.5
  Top 0.254: U3.40 33.02,12.45 34.29,13.72 34.29,15.68 35.24,16.64 39.78,16.64 | 39.78,16.64 39.81,16.64 39.81,13.27 40.44,12.65 v40.69,12.43 41.02,12.13 U9.5 | 39.78,16.64 41.83,18.69 U10.5 | JP1.16 37.4,4.25 v37.4,5.71
  Bottom 0.254: v37.4,5.71 37.4,9.7 40.13,12.45 40.15,12.43 v40.69,12.43
SPI_SCK  (via drill 0.38)
  Top 0.203: 41.65,19.94 U10.6 42.6,19.94 42.86,19.68 42.86,19.05 40.64,16.83 v40.64,13.67 | U3.52 27.65,17.72 27.1,17.17 v27.1,16.31
  Top 0.254: JP1.14 v35.56,5.71 | U9.6 40.91,13.4 v40.64,13.67
  Bottom 0.203: 33.96,13.72 33.96,10.16 34.98,9.14 34.98,6.3 v35.56,5.71
  Bottom 0.254: v40.64,13.67 40.09,13.67 36.83,10.41 36.83,6.99 v35.56,5.71 | v27.1,16.31 27.13,16.31 27.43,16 29.97,16 31.37,14.61 33.07,14.61 33.96,13.72
SRAM_CS  (via drill 0.38)
  Top 0.203: U3.53 27.15,19.1 27.41,19.36 27.51,19.36 v27.84,19.68 | U10.1 37.12,21.24 v37.47,21.59
  Bottom 0.203: v27.84,19.68 27.84,19.71 29.72,21.59 v37.47,21.59
TIM1_CH1
  Top 0.203: U3.41
  Top 0.254: JP1.13 34.61,2.86 34.61,5.71 32.07,8.26 30.42,8.26 29.84,8.83 29.84,12.62 30.18,12.95 U3.41
TIM3_CH1  (via drill 0.38)
  Top 0.254: U3.22 24.15,8.66 v24.51,9.02
  Bottom 0.254: v24.51,9.02 24.51,13.59 21.59,16.51 18.41,16.51 13.97,20.95 13.97,27.94 JP2.7
TIM3_CH2  (via drill 0.38)
  Top 0.203: U3.23 24.64,7.01 24.64,7.75 25.65,8.76 25.65,10.72 v25.91,10.97
  Bottom 0.254: JP2.10 27.43,29.72 27.43,26.61 22.86,22.04 22.86,16.57 25.91,13.53 v25.91,10.97
TIM3_CH3  (via drill 0.38)
  Top 0.203: U3.26 26.14,7.01 26.14,9.64 v26.7,10.2
  Bottom 0.254: JP2.11 27.94,26.35 23.5,21.91 23.5,16.7 26.7,13.5 v26.7,10.2
TIM3_CH4  (via drill 0.38)
  Top 0.203: U3.27 26.67,7.02 26.67,8.59 v27.5,9.41
  Bottom 0.254: JP2.12 30.48,28.13 24.13,21.78 24.13,16.83 27.5,13.46 v27.5,9.41
TIM4_CH1
  Top 0.203: U3.58 24.65,20.05 24.26,20.45 24.26,26.67
  Top 0.254: 24.26,26.67 25.53,27.94 33.66,27.94 35.31,29.59 38.48,29.59 JP2.16
TIM4_CH2
  Top 0.203: U3.59 24.15,19.92 23.75,20.32 23.75,26.92
  Top 0.254: 23.75,26.92 25.4,28.57 33.4,28.57 34.92,30.1 36.45,30.1 JP2.15
TIM4_CH3
  Top 0.203: U3.61 23.15,19.52 22.73,19.94 22.73,22.35
  Top 0.254: 22.73,22.35 21.97,23.11 21.97,25.91 25.27,29.21 33.02,29.21 JP2.14
TIM4_CH4
  Top 0.203: U3.62 22.65,19.39 22.23,19.81 22.23,22.1
  Top 0.254: 22.23,22.1 21.46,22.86 21.46,26.16 25.02,29.72 30.99,29.72 JP2.13
USART1_CTS  (via drill 0.38)
  Top 0.203: U3.44
  Top 0.254: JP1.11 29.53,2.86 31.18,2.86 v32.51,4.19 | U3.44 29.68,14.45 v29.35,14.78
  Bottom 0.254: v32.51,4.19 32.07,4.64 32.07,12.04 v29.35,14.78
USART1_RTS  (via drill 0.38)
  Top 0.254: JP1.12 32,2.79 33.02,2.79 33.66,3.43 v33.66,4.19 | U3.45 31.91,14.95 32.51,14.35 32.51,13.4 v32.55,13.28
  Bottom 0.254: v33.66,4.19 32.7,5.14 32.7,13.21 v32.55,13.28
USART1_RX  (via drill 0.38)
  Top 0.203: JP1.10 25.72,1.27 | 31.08,13.97 U3.43
  Top 0.254: 25.72,1.27 26.99,2.54 28.32,2.54 29.15,3.37 30.54,3.37 v31.37,4.19 | v28.7,13.65 29.02,13.97 31.08,13.97
  Bottom 0.254: v31.37,4.19 31.5,4.32 31.5,10.86 v28.7,13.65
USART1_TX  (via drill 0.38)
  Top 0.254: JP1.9 24.77,3.17 28.07,3.17 29.08,4.19 v30.23,4.19 | v28.7,12.38 28.71,12.38 29.79,13.46 31.09,13.46 U3.42
  Bottom 0.254: v30.23,4.19 30.86,4.83 30.86,10.22 v28.7,12.38
USART3_RX  (via drill 0.38)
  Top 0.203: R14.1 1.94,20.99 v1.91,20.95 1.14,20.19 1.14,18.92 1.37,18.7 U7.P7 | v28.14,5.4 U3.30
  Bottom 0.203: v1.91,20.95 1.91,22.35 2.41,22.86 4.64,22.86 15.18,12.32 15.18,6.41 17.78,3.81 27.3,3.81 28.14,4.65 v28.14,5.4
USART3_TX  (via drill 0.38)
  Top 0.203: R13.1 v0.96,23.27 0.64,22.94 0.64,18.16 1.4,17.39 U7.P9
  Top 0.254: U3.29 27.65,6.06 v26.99,5.4
  Bottom 0.203: v0.96,23.27 1.19,23.5 4.66,23.5 15.62,12.54 15.62,6.57 17.91,4.27 26.12,4.27 26.99,5.13 v26.99,5.4
V+  (8 unrouted)
  Top 0.203: 59.69,25.4 59.42,25.4
  Top 0.254: U6.P$10 59.51,25.31 59.42,25.4 | U6.P$7 61.51,26.27 62.42,27.18 62.42,28.26 61.94,28.73 59.42,28.73
  Top 0.61: U8.3 59.17,25.92 59.69,25.4 59.69,25.27 58.42,24 57.45,24 | 57.45,24 U8.1 | 57.45,24 57.45,22.45 C20.1
  Top 0.813: BAT.TP 52.7,36.32 53.34,36.96 58.55,36.96 59.38,36.12 59.38,29.36
  Top 1.016: 59.42,28.73 59.42,25.4 59.42,25.04 59.53,24.92
VCCINT
  Bottom 1.676: PWR.16 PWR.15 PWR.14 PWR.13 PWR.12 PWR.11 PWR.10 PWR.9 JP2.9

## Text on the board
tNames: BOOT1 | JTAG | BOOT0 | Pygmy WEB V1.0 by Warren D Greenway
Reference: ADC1_IN10 | ADC1_IN11 | ADC1_IN12 | ADC1_IN13 | ADC1_IN14 | ADC1_IN15 | TIM3_CH1 | +3.3V | +5V | TIM3_CH2 | TIM3_CH3 | TIM3_CH4 | TIM4_CH4 | TIM4_CH3 | TIM4_CH2 | TIM4_CH1 | 0.25-6V Input | LiPo 4.2V Charge | GND | PA0 | PA1 | PA2 | PA3 | GND | DAC1 | DAC2 | SPI_CS1 | SPI_SCK | SPI_MISO | SPI_MOSI | TIM1_CH1 | USART1_TX | USART1_RX | USART1_CTS | USART1_RTS